# EAGLE board ArtNet_Node (EAGLE 6.5.0)
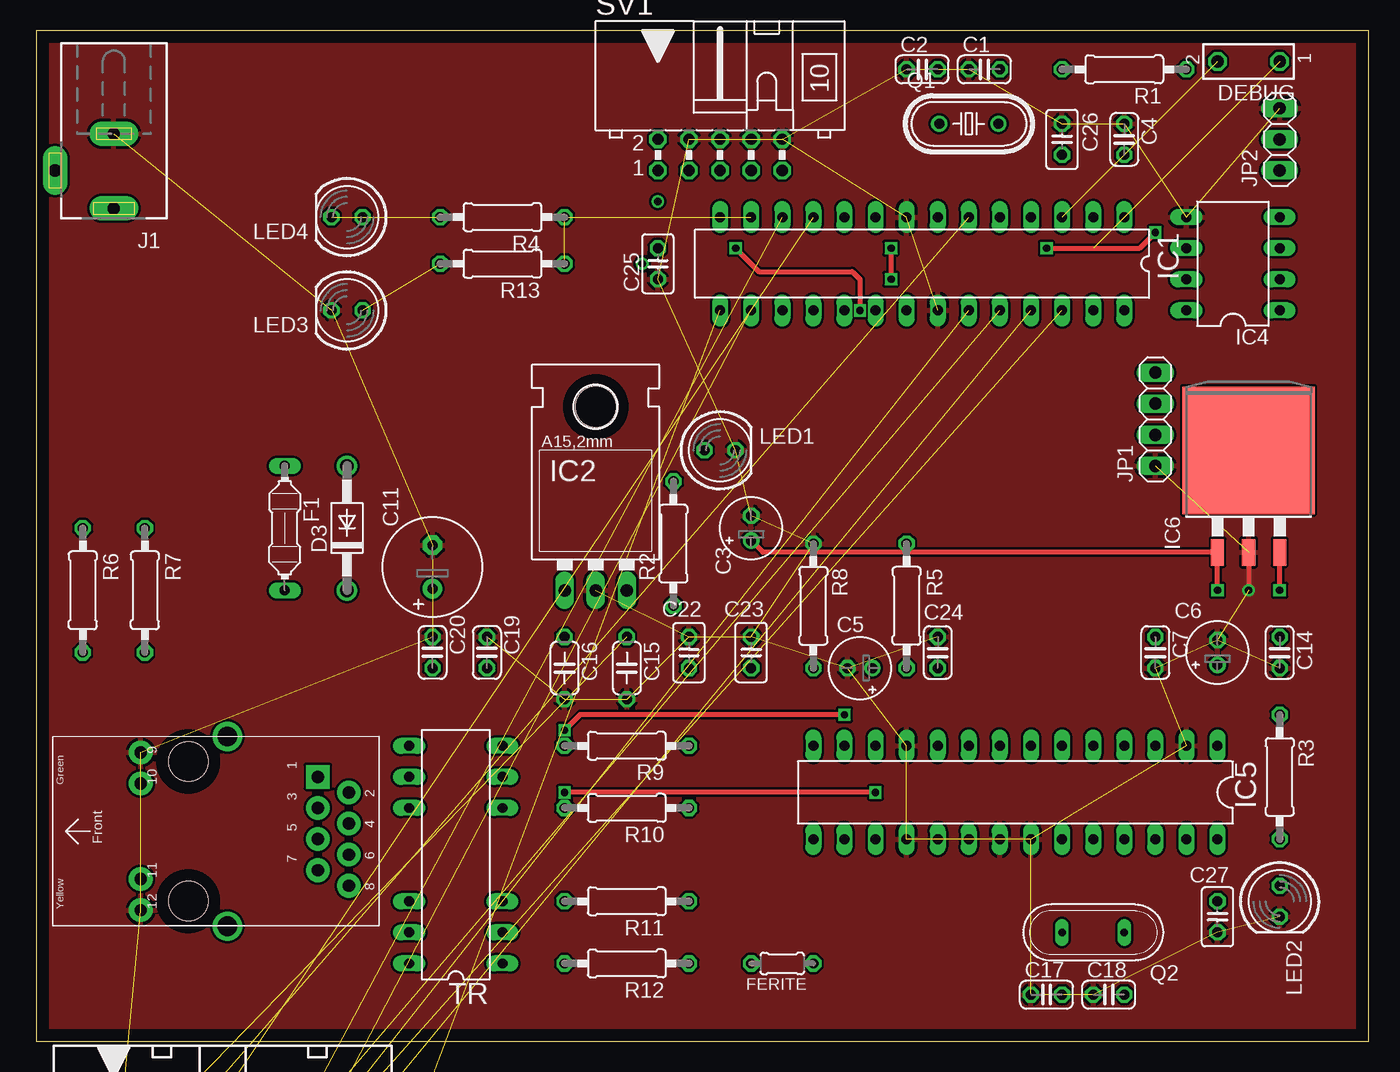
[diagram p0: board, top side]
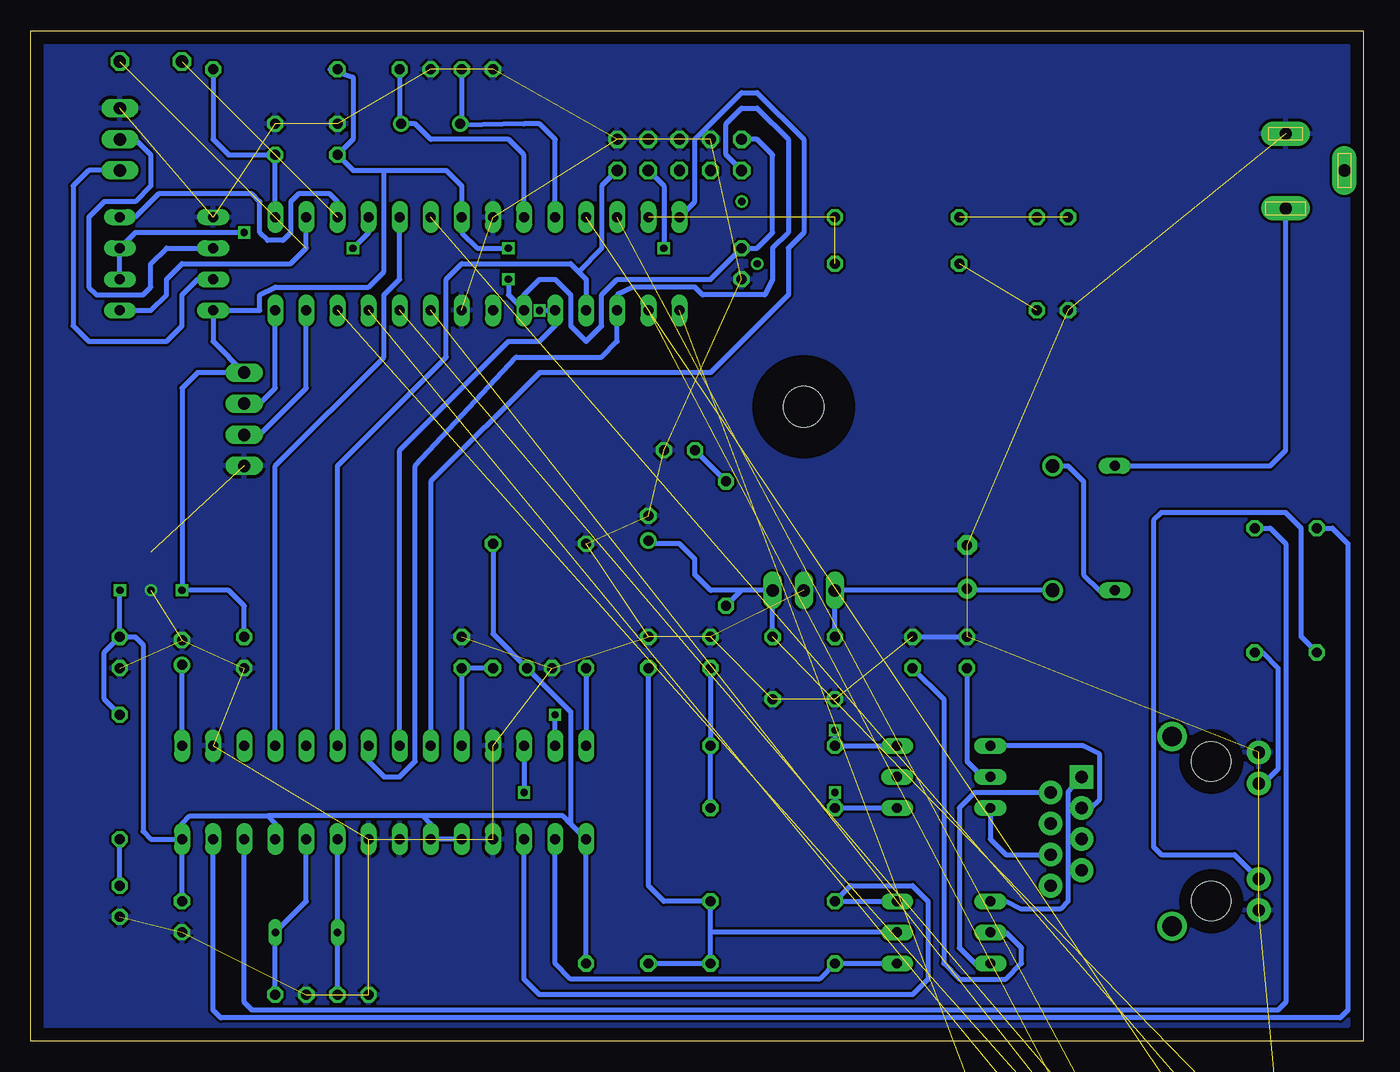
[diagram p1: board, bottom side, seen from below]

Size 108.89 x 82.54 mm. Coordinates in mm from the lower left corner, seen from the top.
Outline: 0,0 108.89,0 108.89,82.54 0,82.54 0,0
Copper layers (1*16): Top 0.035mm / dielectric 1.5mm / Bottom 0.035mm
Design rules "default": minimum track width 10mil, minimum drill 24mil, track to track 8mil, track to pad 8mil, pad to pad 8mil, via to via 8mil, smd to smd 8mil, copper to edge 40mil, drill to drill 8mil, minimum pad ring 10mil, minimum via ring 8mil, stop-mask expansion 4mil, vias tented up to drill 0mil, thermal gap 10mil
Net classes: 0 default: clearance 0.205 mm

## Footprints (pad centres in the part's own frame; a part is rotated, then mirrored left to right if it is on the bottom)
C025-024X044 = drill 0.813 octagon: 1 -1.27,0; 2 1.27,0
E2-5 = drill 0.813 pad 1.27: + -1.016,0 | drill 0.813 pad 1.27 octagon: - 1.016,0
E3,5-8 = drill 0.813 pad 1.6: + -1.778,0 | drill 0.813 pad 1.6 octagon: - 1.778,0
C050-024X044 = drill 0.813 octagon: 1 -2.54,0; 2 2.54,0
C025-025X050 = drill 0.813 octagon: 1 -1.27,0; 2 1.27,0
DO41-10 = drill 1.118: A 5.08,0; C -5.08,0
TSW-101-02-S-Q = drill 1 pad 1.5 octagon: 1 0,-2.54; 2 0,2.54
PICOFUSE = drill 0.813 long: 1 -5.08,0; 2 5.08,0
0204/5 = drill 0.813 octagon: 1 -2.54,0; 2 2.54,0
DIL28-3 = drill 0.813 long: 1 -16.51,-3.81; 2 -13.97,-3.81; 3 -11.43,-3.81; 4 -8.89,-3.81; 5 -6.35,-3.81; 6 -3.81,-3.81; 7 -1.27,-3.81; 8 1.27,-3.81; 9 3.81,-3.81; 10 6.35,-3.81; 11 8.89,-3.81; 12 11.43,-3.81; 13 13.97,-3.81; 14 16.51,-3.81; 15 16.51,3.81; 16 13.97,3.81; 17 11.43,3.81; 18 8.89,3.81; 19 6.35,3.81; 20 3.81,3.81; 21 1.27,3.81; 22 -1.27,3.81; 23 -3.81,3.81; 24 -6.35,3.81; 25 -8.89,3.81; 26 -11.43,3.81; 27 -13.97,3.81; 28 -16.51,3.81
78XXL = drill 1.016 long: GND 0,-3.81; IN -2.54,-3.81; OUT 2.54,-3.81 | hole 3.302: 0,11.176
DIL16 = drill 0.813 long: 1 -8.89,-3.81; 2 -6.35,-3.81; 3 -3.81,-3.81; 4 -1.27,-3.81; 5 1.27,-3.81; 6 3.81,-3.81; 7 6.35,-3.81; 8 8.89,-3.81; 9 8.89,3.81; 10 6.35,3.81; 11 3.81,3.81; 12 1.27,3.81; 13 -1.27,3.81; 14 -3.81,3.81; 15 -6.35,3.81; 16 -8.89,3.81
DIL08 = drill 0.813 long: 1 -3.81,-3.81; 2 -1.27,-3.81; 3 1.27,-3.81; 4 3.81,-3.81; 5 3.81,3.81; 6 1.27,3.81; 7 -1.27,3.81; 8 -3.81,3.81
TO263-3 = smd 1.067 x 2.159: 1 -2.54,-5.791; 2 0,-5.791; 3 2.54,-5.791 | smd 10.8 x 10.41: TAB 0,2.54
DCJ0202 = drill 1 pad 2 long: 1 0,3.1; 2 4.8,0; 3 0,-3
1X04 = drill 1.016 long: 1 -3.81,0; 2 -1.27,0; 3 1.27,0; 4 3.81,0
1X03 = drill 1.016 long: 1 -2.54,0; 2 0,0; 3 2.54,0
LED5MM = drill 0.813 octagon: A -1.27,0; K 1.27,0
HC49U-V = drill 0.813: 1 -2.413,0; 2 2.413,0
QS = drill 0.61 long: 1 -2.54,0; 2 2.54,0
0207/10 = drill 0.813 octagon: 1 -5.08,0; 2 5.08,0
RTRIM74X = drill 0.61: 1 -1.25,-2.5; 2 1.25,0; 3 -1.25,2.5
ML10L = drill 0.914 octagon: 1 -5.08,-1.27; 2 -5.08,1.27; 3 -2.54,-1.27; 4 -2.54,1.27; 5 0,-1.27; 6 0,1.27; 7 2.54,-1.27; 8 2.54,1.27; 9 5.08,-1.27; 10 5.08,1.27
DIL16/12 = drill 0.813 long: 1 -8.89,-3.81; 2 -6.35,-3.81; 3 -3.81,-3.81; 4 3.81,-3.81; 5 6.35,-3.81; 6 8.89,-3.81; 7 8.89,3.81; 8 6.35,3.81; 9 3.81,3.81; 10 -3.81,3.81; 11 -6.35,3.81; 12 -8.89,3.81
1XRJ45_MM_JACK = drill 1.6: CASEGND -7.75,-4.2; P$2 7.75,-4.2 | drill 1 pad 1.93: GND 0.635,-14.13; L1 6.44,2.88; L2 3.9,2.88; L3 -6.44,2.88; L4 -3.9,2.88; P$9 -0.635,-11.59; RX0 -4.445,-14.13; RX+ 1.905,-11.59; RX- -1.905,-14.13; TX0 -3.175,-11.59; TX- 3.175,-14.13 | drill 1 pad 1.93 square: TX+ 4.445,-11.59 | hole 3.2: 5.7,-1; -5.7,-1
PAK100/2500-5-16 = drill 1 pad 1.422: 1 -8.89,-1.27; 2 -8.89,1.27; 3 -6.35,-1.27; 4 -6.35,1.27; 5 -3.81,-1.27; 6 -3.81,1.27; 7 -1.27,-1.27; 8 -1.27,1.27; 9 1.27,-1.27; 10 1.27,1.27; 11 3.81,-1.27; 12 3.81,1.27; 13 6.35,-1.27; 14 6.35,1.27; 15 8.89,-1.27; 16 8.89,1.27

## Placement (x,y rotation side)
C1  22p  [C025-024X044]  77.47,79.38 0 top
C2  22p  [C025-024X044]  72.39,79.38 0 top
C3  10µ  [E2-5]  58.42,41.91 90 top
C4  100n  [C025-024X044]  88.9,73.66 270 top
C5  10µ  [E2-5]  67.31,30.48 180 top
C6  10µ  [E2-5]  96.52,31.75 90 top
C7  100n  [C025-024X044]  91.44,31.75 270 top
C11  220µF  [E3,5-8]  32.38,38.73 90 top
C14  100n  [C025-024X044]  101.6,31.75 270 top
C15  100n  [C050-024X044]  48.26,30.48 270 top
C16  100n  [C050-024X044]  43.18,30.48 270 top
C17  22p  [C025-024X044]  82.55,3.81 0 top
C18  22p  [C025-024X044]  87.63,3.81 0 top
C19  1n  [C025-024X044]  36.83,31.75 90 top
C20  1n  [C025-024X044]  32.38,31.75 90 top
C22  10n  [C025-025X050]  53.34,31.75 90 top
C23  10n  [C025-025X050]  58.42,31.75 90 top
C24  100n  [C025-024X044]  73.66,31.75 270 top
C25  100n  [C025-025X050]  50.8,63.5 90 top
C26  100n  [C025-025X050]  83.82,73.66 90 top
C27  100n  [C025-025X050]  96.52,10.16 270 top
D3  1N4004  [DO41-10]  25.4,41.91 90 top
DEBUG  TSW-101-02-S-Q  [TSW-101-02-S-Q]  99.06,80.01 90 top
F1  [PICOFUSE]  20.32,41.91 270 top
FERITE  [0204/5]  60.96,6.35 180 top
IC1  MEGA328-P  [DIL28-3]  72.39,63.5 180 top
IC2  78S05  [78XXL]  45.72,40.64 0 top
IC3  74LS165N  [DIL16]  12.7,-35.56 0 top  (outside the outline)
IC4  75176AP  [DIL08]  97.79,63.5 90 top
IC5  ENC28J60-DIL  [DIL28-3]  80.01,20.32 180 top
IC6  LM2937  [TO263-3]  99.06,45.72 0 top
J1  DCJ0202  [DCJ0202]  6.35,71.12 180 top
JP1  [1X04]  91.44,50.8 90 top
JP2  [1X03]  101.6,73.66 90 top
LED1  [LED5MM]  55.88,48.26 0 top
LED2  [LED5MM]  101.6,11.43 270 top
LED3  [LED5MM]  25.4,59.69 180 top
LED4  [LED5MM]  25.4,67.31 180 top
Q1  20Mhz  [HC49U-V]  76.2,74.93 0 top
Q2  25Mhz  [QS]  86.36,8.89 0 top
R1  10k  [0207/10]  88.9,79.38 180 top
R2  820  [0207/10]  52.07,40.64 90 top
R3  180  [0207/10]  101.6,21.59 270 top
R4  180  [0207/10]  38.1,67.31 180 top
R5  10k  [0207/10]  71.12,35.56 90 top
R6  180  [0207/10]  3.81,36.83 90 top
R7  180  [0207/10]  8.89,36.83 90 top
R8  2,7k  [0207/10]  63.5,35.56 270 top
R9  47  [0207/10]  48.26,24.13 180 top
R10  47  [0207/10]  48.26,19.05 180 top
R11  47  [0207/10]  48.26,11.43 180 top
R12  47  [0207/10]  48.26,6.35 180 top
R13  180  [0207/10]  38.1,63.5 180 top
R14  [RTRIM74X]  3.81,-20.32 0 top  (outside the outline)
R15  180  [0207/10]  6.35,-27.94 0 top  (outside the outline)
R16  10k  [0207/10]  6.35,-45.72 0 top  (outside the outline)
R17  10k  [0207/10]  6.35,-50.8 0 top  (outside the outline)
R18  10k  [0207/10]  6.35,-55.88 0 top  (outside the outline)
R19  10k  [0207/10]  6.35,-60.96 0 top  (outside the outline)
R20  10k  [0207/10]  6.35,-66.04 0 top  (outside the outline)
R21  10k  [0207/10]  6.35,-71.12 0 top  (outside the outline)
R22  10k  [0207/10]  6.35,-76.2 0 top  (outside the outline)
R23  10k  [0207/10]  6.35,-81.28 0 top  (outside the outline)
SV1  [ML10L]  55.88,72.39 0 top
TR  [DIL16/12]  34.29,15.24 90 top
U$1  [1XRJ45_MM_JACK]  11.43,17.14 90 top
X1  2516-5  [PAK100/2500-5-16]  15.24,-11.43 0 top  (outside the outline)

## Library data of the parts
C1-C7 C11 C14-C20 C22-C27 FERITE R1-R13 R15-R23 = rcl
D3 = diode
DEBUG = con-samtec; OC_FARNELL: unknown; OC_NEWARK: unknown
F1 = fuse
IC1 = atmel; OC_FARNELL: unknown; OC_NEWARK: unknown
IC2 = v-reg
IC3 = 74xx-us
IC4 = 751xx
IC5 = enc28j60centered
IC6 = linear
J1 = con-jack; OC_FARNELL: unknown; OC_NEWARK: unknown
JP1 JP2 = pinhead
LED1-LED4 = led
Q1 = crystal
Q2 = special
R14 = resistor
SV1 = con-harting-ml; OC_FARNELL: unknown; OC_NEWARK: unknown
TR = Realtek
U$1 = con-ppt_prj006
X1 = con-3m; MPN: D2516-5002-AR; OC_FARNELL: 9838376; OC_NEWARK: 12P7055

## Nets
!RESET: C4.2 IC1.1 R1.1
+3V3: C5.+ C14.1 C27.1 FERITE.1 IC5.15 IC5.19 IC5.20 IC5.25 IC5.28 IC6.3 R3.1 R5.2
DIR_IO: IC1.4 IC4.2 IC4.3
ETH_CS: IC1.14 IC5.9
ETH_INT: IC1.5 IC5.4
GND: C1.1 C2.1 C3.- C4.1 C5.- C6.- C7.2 C11.- C14.2 C15.2 C16.2 C17.1 C18.1 C19.2 C20.2 C22.2 C23.2 C24.1 C25.1 C26.2 C27.2 IC1.8 IC1.22 IC2.GND IC3.8 IC4.5 IC5.2 IC5.11 IC5.18 IC5.21 IC5.22 IC6.2 J1.3 JP1.1 JP2.3 LED1.K LED2.K LED3.K R8.1 R14.1 SV1.4 SV1.6 SV1.8 SV1.10 U$1.L1 U$1.L3 X1.1 X1.5 X1.16
L2: R6.1 U$1.L4
L3: R7.1 U$1.L2
MISO: IC1.18 IC5.6 SV1.9
MOSI: IC1.17 IC5.7 SV1.1
N$1: C2.2 IC1.10 Q1.1
N$2: C1.2 IC1.9 Q1.2
N$3: TR.9 U$1.RX-
N$6: D3.A F1.2
N$7: TR.12 U$1.TX-
N$8: TR.10 U$1.TX+
N$9: IC4.7 JP2.1
N$10: F1.1 J1.1
N$11: IC5.27 R6.2
N$12: IC1.27 JP1.2
N$13: IC4.6 JP2.2
N$14: IC5.26 R7.2
N$15: TR.7 U$1.RX+
N$16: C20.1 TR.8
N$17: C19.1 TR.11
N$20: C18.2 IC5.24 Q2.2
N$21: C17.2 IC5.23 Q2.1
N$22: IC5.12 R10.2 TR.4
N$23: IC5.13 R9.2 TR.6
N$24: IC5.16 R12.2 TR.1
N$25: IC5.17 R11.2 TR.3
N$26: IC5.14 R8.2
N$27: C6.+ IC5.1
N$28: IC1.28 JP1.3
N$29: C22.1 R9.1 R10.1
N$30: C24.2 IC5.10 R5.1
N$31: LED1.A R2.2
N$32: LED2.A R3.2
N$33: IC1.13 R4.1 R13.1
N$34: R14.2 X1.3
N$35: LED3.A R13.2
N$36: LED4.K R4.2
N$37: IC3.11 R23.2
N$38: R15.2 X1.15
N$39: IC3.12 R22.2
N$40: IC3.13 R21.2
N$41: IC3.14 R20.2
N$42: IC3.3 R19.2
N$43: IC3.4 R18.2
N$44: IC3.5 R17.2
N$45: IC3.6 R16.2
N$46: LED4.A
N$248: C23.1 FERITE.2 R11.1 R12.1 TR.2
N$250: C11.+ C16.1 D3.C IC2.IN
PC0: IC1.23 X1.11
PC1: IC1.24 X1.12
PC2: IC1.25 X1.13
PC3: IC1.26 X1.14
PD4: IC1.6 X1.4
PD5: IC1.11 X1.6
PISO1: IC1.12 IC3.1
PISO2: IC1.16 IC3.2
PISO3: IC1.15 IC3.9
RESET: SV1.5
RXD: DEBUG.1 IC1.2 IC4.1
SCK: IC1.19 IC5.8 SV1.7
TXD: DEBUG.2 IC1.3 IC4.4
VCC: C3.+ C7.1 C15.1 C25.2 C26.1 IC1.7 IC1.20 IC2.OUT IC3.16 IC4.8 IC6.1 JP1.4 R1.2 R2.1 R14.3 R15.1 SV1.2 X1.2

## Tracks (layer width: path | path; a pad name or v marks a point on that pad's centre or on a via)
!RESET
  Bottom 0.406: IC1.1 C4.2 92.71,72.39 93.98,73.66 R1.1
+3V3  (via drill 0.6)
  Top 0.406: v101.6,36.83 IC6.3
  Bottom 0.406: FERITE.1 IC5.15 64.77,17.78 | IC5.28 96.52,17.78 95.89,18.41 89.53,18.41 | 89.53,18.41 88.9,17.78 IC5.25 | C27.1 IC5.28 | R5.2 71.12,33.27 C5.+ 64.77,26.92 64.77,17.78 | C14.1 v101.6,36.83 | C14.1 100.33,33.02 99.69,32.38 99.69,17.14 99.06,16.51 IC5.28 | 76.83,18.41 76.2,17.78 IC5.20 IC5.19 | 76.83,18.41 89.53,18.41 | 64.77,17.78 65.41,18.41 76.83,18.41 | R3.1 102.87,27.94 102.87,31.75 C14.1
DIR_IO  (via drill 0.6)
  Top 0.406: v82.55,64.77 90.17,64.77 v91.44,66.04
  Bottom 0.406: IC1.4 81.28,66.04 v82.55,64.77 | v91.44,66.04 100.33,66.04 IC4.3 IC4.2
ETH_CS
  Bottom 0.406: IC1.14 54.61,68.58 54.61,73.66 50.8,77.47 49.53,77.47 45.72,73.66 45.72,66.04 46.99,64.77 46.99,60.96 53.34,54.61 67.31,54.61 76.2,45.72 IC5.9
ETH_INT
  Bottom 0.406: IC5.4 88.9,46.99 80.01,55.88 80.01,60.96 78.74,62.23 IC1.5
GND  (via drill 0.6)  (47 unrouted)
  Top 0.406: IC6.2 v99.06,36.83
  Bottom 0.406: C19.2 C20.2
  pour Bottom: 1.27,1.27 107.95,1.27 107.95,81.28 1.27,81.28
  pour Top: 0,82.55 107.95,82.55 107.95,0 0,0
L2
  Bottom 0.406: R6.1 5.08,33.02 5.08,41.91 6.35,43.18 16.51,43.18 17.14,42.55 17.14,15.88 16.51,15.24 10.54,15.24 U$1.L4
L3
  Bottom 0.406: R7.1 8.26,31.75 6.99,30.48 6.99,22.22 8.16,21.04 U$1.L2
MISO
  Bottom 0.406: IC5.6 83.82,46.99 74.93,55.88 74.93,62.23 73.66,63.5 64.77,63.5 64.14,62.87 | 64.14,62.87 63.5,62.23 IC1.18 | SV1.9 62.23,69.85 62.23,64.77 64.14,62.87
MOSI
  Bottom 0.406: IC5.7 81.28,22.86 80.01,21.59 78.74,21.59 77.47,22.86 77.47,46.99 69.22,55.88 62.23,55.88 60.96,57.15 IC1.17 60.96,60.96 59.69,61.59 54.61,61.59 53.98,60.96 48.9,60.96 48.26,62.23 48.26,64.77 46.99,66.04 46.99,73.66 49.53,76.2 50.8,76.2 52.07,74.93 52.07,72.39 SV1.1
N$1
  Bottom 0.406: IC1.10 66.04,73.66 67.31,74.93 68.58,74.93 73.66,74.8 Q1.1 73.66,75.06 C2.2
N$2
  Bottom 0.406: IC1.9 68.58,72.39 69.85,73.66 76.2,73.66 77.47,74.93 Q1.2 78.74,75.06 C1.2
N$3
  Bottom 0.406: TR.9 30.48,16.51 29.21,15.24 U$1.RX-
N$4  (via drill 0.6)
  other vias: 101.6,36.83
N$5  (via drill 0.6)
  other vias: 96.52,36.83
N$6
  Bottom 0.406: D3.A 24.13,46.99 22.86,45.72 22.86,38.1 21.59,36.83 F1.2
N$7
  Bottom 0.406: TR.12 31.75,6.35 33.02,7.62 33.02,19.05 31.75,20.32 U$1.TX-
N$8
  Bottom 0.406: TR.10 29.21,11.43 27.94,10.8 24.77,10.8 24.13,11.43 24.13,20.32 U$1.TX+
N$9
  Bottom 0.406: JP2.1 104.14,71.12 105.41,69.85 105.41,58.42 104.14,57.15 97.79,57.15 96.52,58.42 96.52,60.96 95.25,62.23 IC4.7
N$10
  Bottom 0.406: F1.1 7.62,46.99 6.35,48.26 J1.1
N$11
  Bottom 0.406: R6.2 2.54,41.91 1.27,40.64 1.27,2.54 1.91,1.91 93.34,1.91 93.98,2.54 IC5.27
N$12
  Bottom 0.406: JP1.2 90.17,49.53 86.36,53.34 IC1.27
N$13
  Bottom 0.406: JP2.2 100.33,73.66 99.06,72.39 99.06,69.85 100.33,68.58 102.87,68.58 104.14,67.31 104.14,61.59 103.5,60.96 99.69,60.96 99.06,61.59 99.06,63.5 97.79,64.77 IC4.6
N$14
  Bottom 0.406: R7.2 7.62,41.91 6.35,40.64 6.35,3.17 6.99,2.54 90.81,2.54 91.44,3.17 IC5.26
N$15
  Bottom 0.406: TR.7 22.86,24.13 21.59,23.49 21.59,19.68 22.23,19.05 U$1.RX+
N$16
  Bottom 0.406: C20.1 32.38,22.86 31.11,21.59 TR.8
N$17
  Bottom 0.406: C19.1 34.29,27.94 34.29,6.35 33.02,5.08 29.21,5.08 27.94,6.35 27.94,7.62 29.21,8.89 TR.11
N$18  (via drill 0.6)
  other vias: 50.8,68.58
N$19  (via drill 0.6)
  other vias: 49.53,63.5
N$20
  Bottom 0.406: IC5.24 86.36,11.43 Q2.2 C18.2
N$21
  Bottom 0.406: IC5.23 Q2.1 C17.2
N$22  (via drill 0.6)
  Top 0.406: v68.58,20.32 v43.18,20.32
  Bottom 0.406: TR.4 R10.2 v43.18,20.32 | IC5.12 v68.58,20.32
N$23  (via drill 0.6)
  Top 0.406: v66.04,26.67 44.45,26.67 v43.18,25.4
  Bottom 0.406: TR.6 R9.2 v43.18,25.4 | IC5.13 v66.04,26.67
N$24
  Bottom 0.406: TR.1 R12.2 44.45,5.08 64.77,5.08 66.04,6.35 IC5.16
N$25
  Bottom 0.406: TR.3 R11.2 41.91,12.7 36.83,12.7 35.56,11.43 35.56,5.08 36.83,3.81 67.31,3.81 68.58,5.08 IC5.17
N$26
  Bottom 0.406: R8.2 IC5.14
N$27
  Bottom 0.406: IC5.1 C6.+
N$28
  Bottom 0.406: JP1.3 90.17,52.07 88.9,53.34 IC1.28
N$29
  Bottom 0.406: C22.1 R9.1 R10.1
N$30
  Bottom 0.406: IC5.10 C24.2 R5.1
N$31
  Bottom 0.406: R2.2 LED1.A
N$32
  Bottom 0.406: LED2.A R3.2
N$33  (2 unrouted)
N$34  (1 unrouted)
N$35  (1 unrouted)
N$36  (1 unrouted)
N$37  (1 unrouted)
N$38  (1 unrouted)
N$39  (1 unrouted)
N$40  (1 unrouted)
N$41  (1 unrouted)
N$42  (1 unrouted)
N$43  (1 unrouted)
N$44  (1 unrouted)
N$45  (1 unrouted)
N$248
  Bottom 0.406: 53.34,8.89 R12.1 FERITE.2 | 53.34,8.89 R11.1 57.15,11.43 58.42,12.7 C23.1 | TR.2 53.34,8.89
N$250
  Bottom 0.406: C16.1 IC2.IN 32.51,36.83 C11.+ 32.26,36.83 D3.C
PC0  (1 unrouted)
PC1  (1 unrouted)
PC2  (1 unrouted)
PC3  (1 unrouted)
PD4  (1 unrouted)
PD5  (1 unrouted)
PISO1  (1 unrouted)
PISO2  (1 unrouted)
PISO3  (1 unrouted)
RXD  (1 unrouted)
  Bottom 0.406: IC4.1 99.06,59.69 97.79,60.96 97.79,62.23 96.52,63.5 87.63,63.5 86.36,64.77 IC1.2
SCK  (via drill 0.6)
  Top 0.406: v57.15,64.77 59.05,62.87 66.67,62.87 67.31,62.23 v67.31,59.69
  Bottom 0.406: IC5.8 78.74,48.26 69.85,57.15 67.31,57.15 66.04,58.42 IC1.19 v67.31,59.69 | SV1.7 57.15,69.85 v57.15,64.77
TXD  (1 unrouted)
  Bottom 0.406: IC1.3 83.82,68.58 84.45,69.22 87,69.22 87.63,68.58 87.63,66.04 88.27,65.41 89.53,65.41 90.17,66.04 90.17,68.58 90.81,69.22 98.42,69.22 100.33,67.31 IC4.4
VCC  (via drill 0.6)  (4 unrouted)
  Top 0.406: v96.52,36.83 IC6.1 59.38,39.93 C3.+ | v69.85,64.77 v69.85,62.23
  Bottom 0.406: C7.1 91.44,35.56 92.71,36.83 v96.52,36.83 96.52,53.34 95.25,54.61 JP1.4 93.98,57.15 IC4.8 90.17,59.69 90.17,60.96 88.9,61.59 81.28,61.59 80.01,62.87 80.01,71.12 | R1.2 84.45,79.38 82.55,78.74 82.55,73.66 C26.1 82.55,71.12 80.01,71.12 | 80.01,71.12 74.93,71.12 73.66,69.85 IC1.7 73.66,66.04 72.39,64.77 v69.85,64.77 | C15.1 IC2.OUT 50.8,36.83 | SV1.2 49.53,73.66 48.26,72.39 48.26,66.04 49.53,64.77 C25.2 53.34,62.23 60.96,62.23 62.23,60.96 62.23,58.42 63.5,57.15 64.77,58.42 64.77,60.96 66.04,62.23 67.31,62.23 68.58,60.96 IC1.20 69.85,60.96 v69.85,62.23 | 50.8,36.83 53.34,36.83 54.61,38.1 54.61,39.37 55.88,40.64 58.17,40.64 C3.+ | R2.1 50.8,36.83